# Allegro board pc065a_toplevel_05_remove_notch.brd
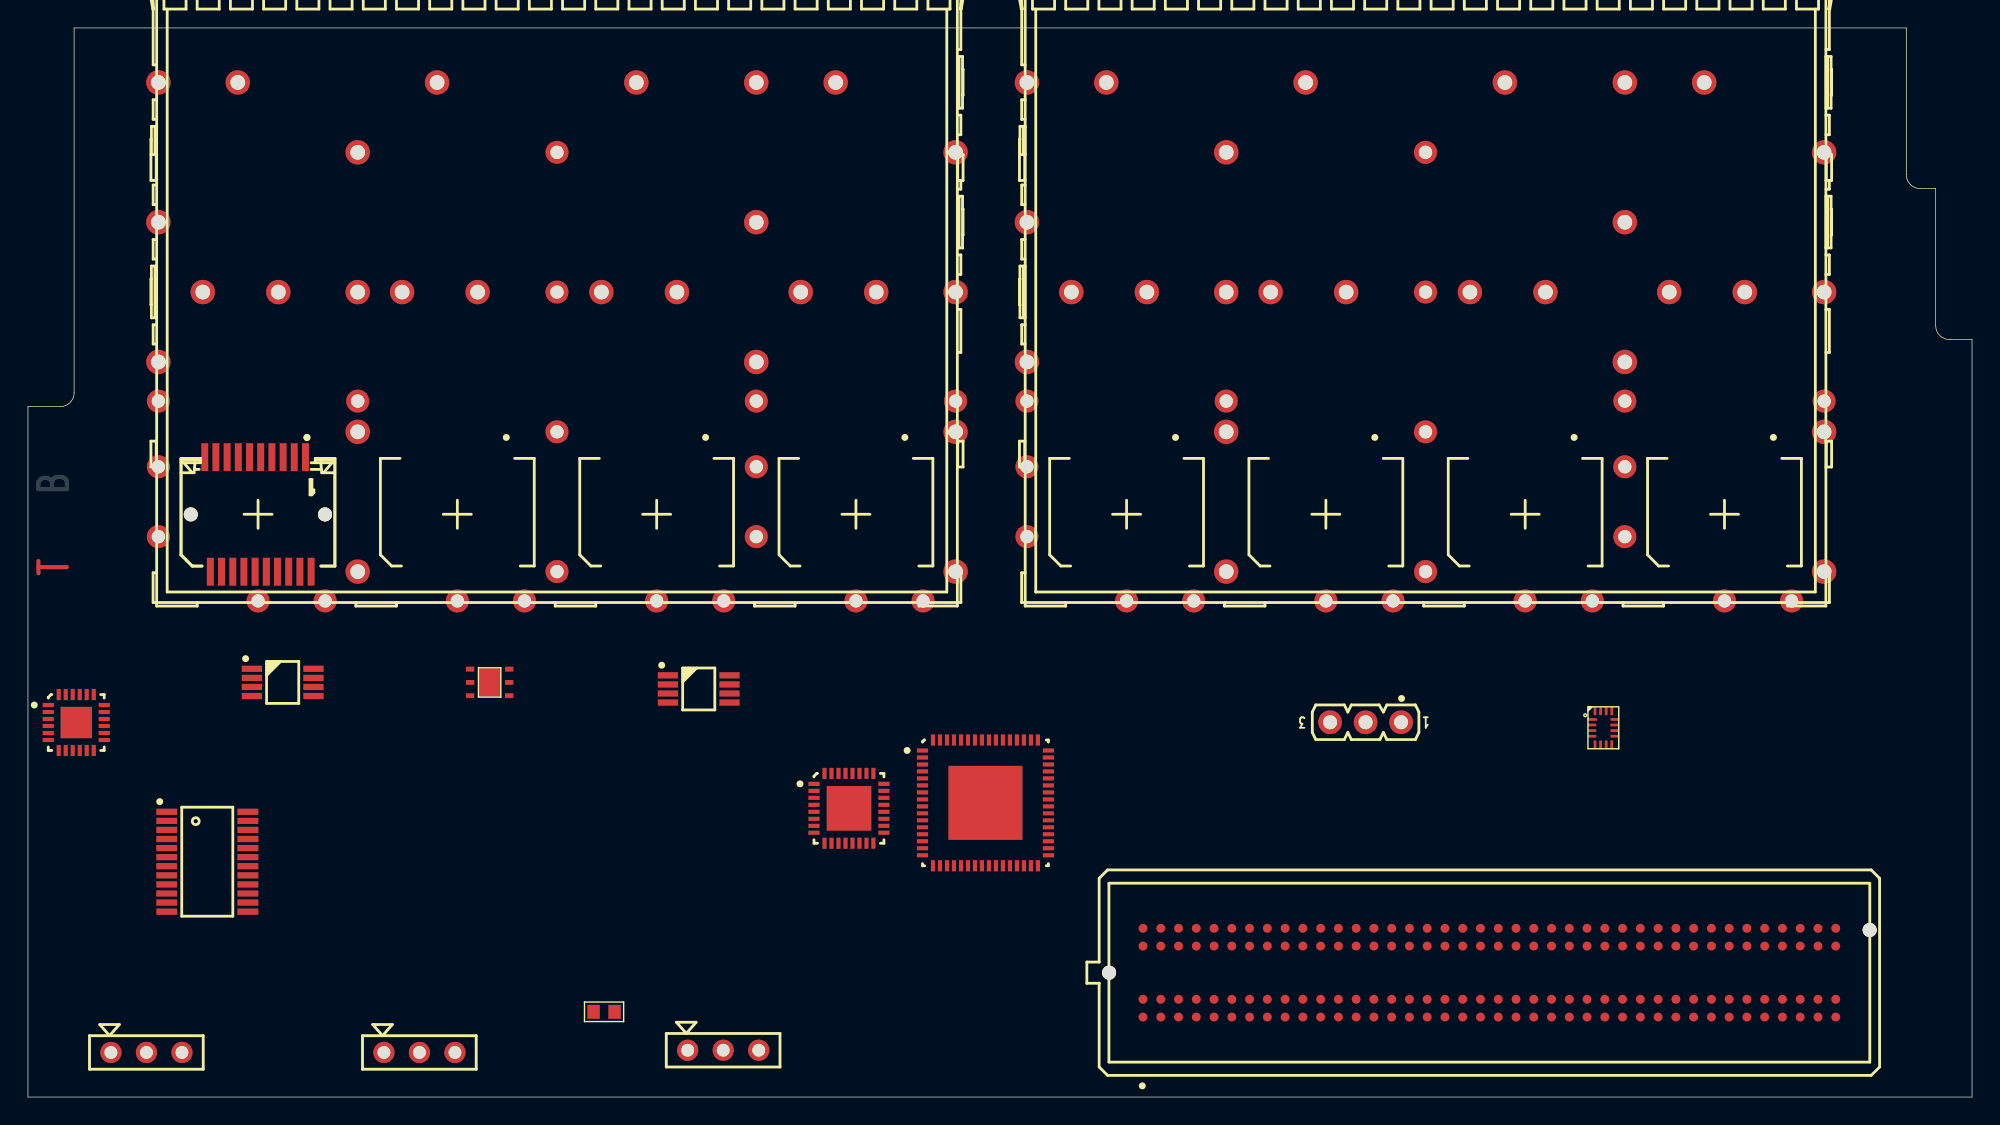
[diagram p0: board, top side]
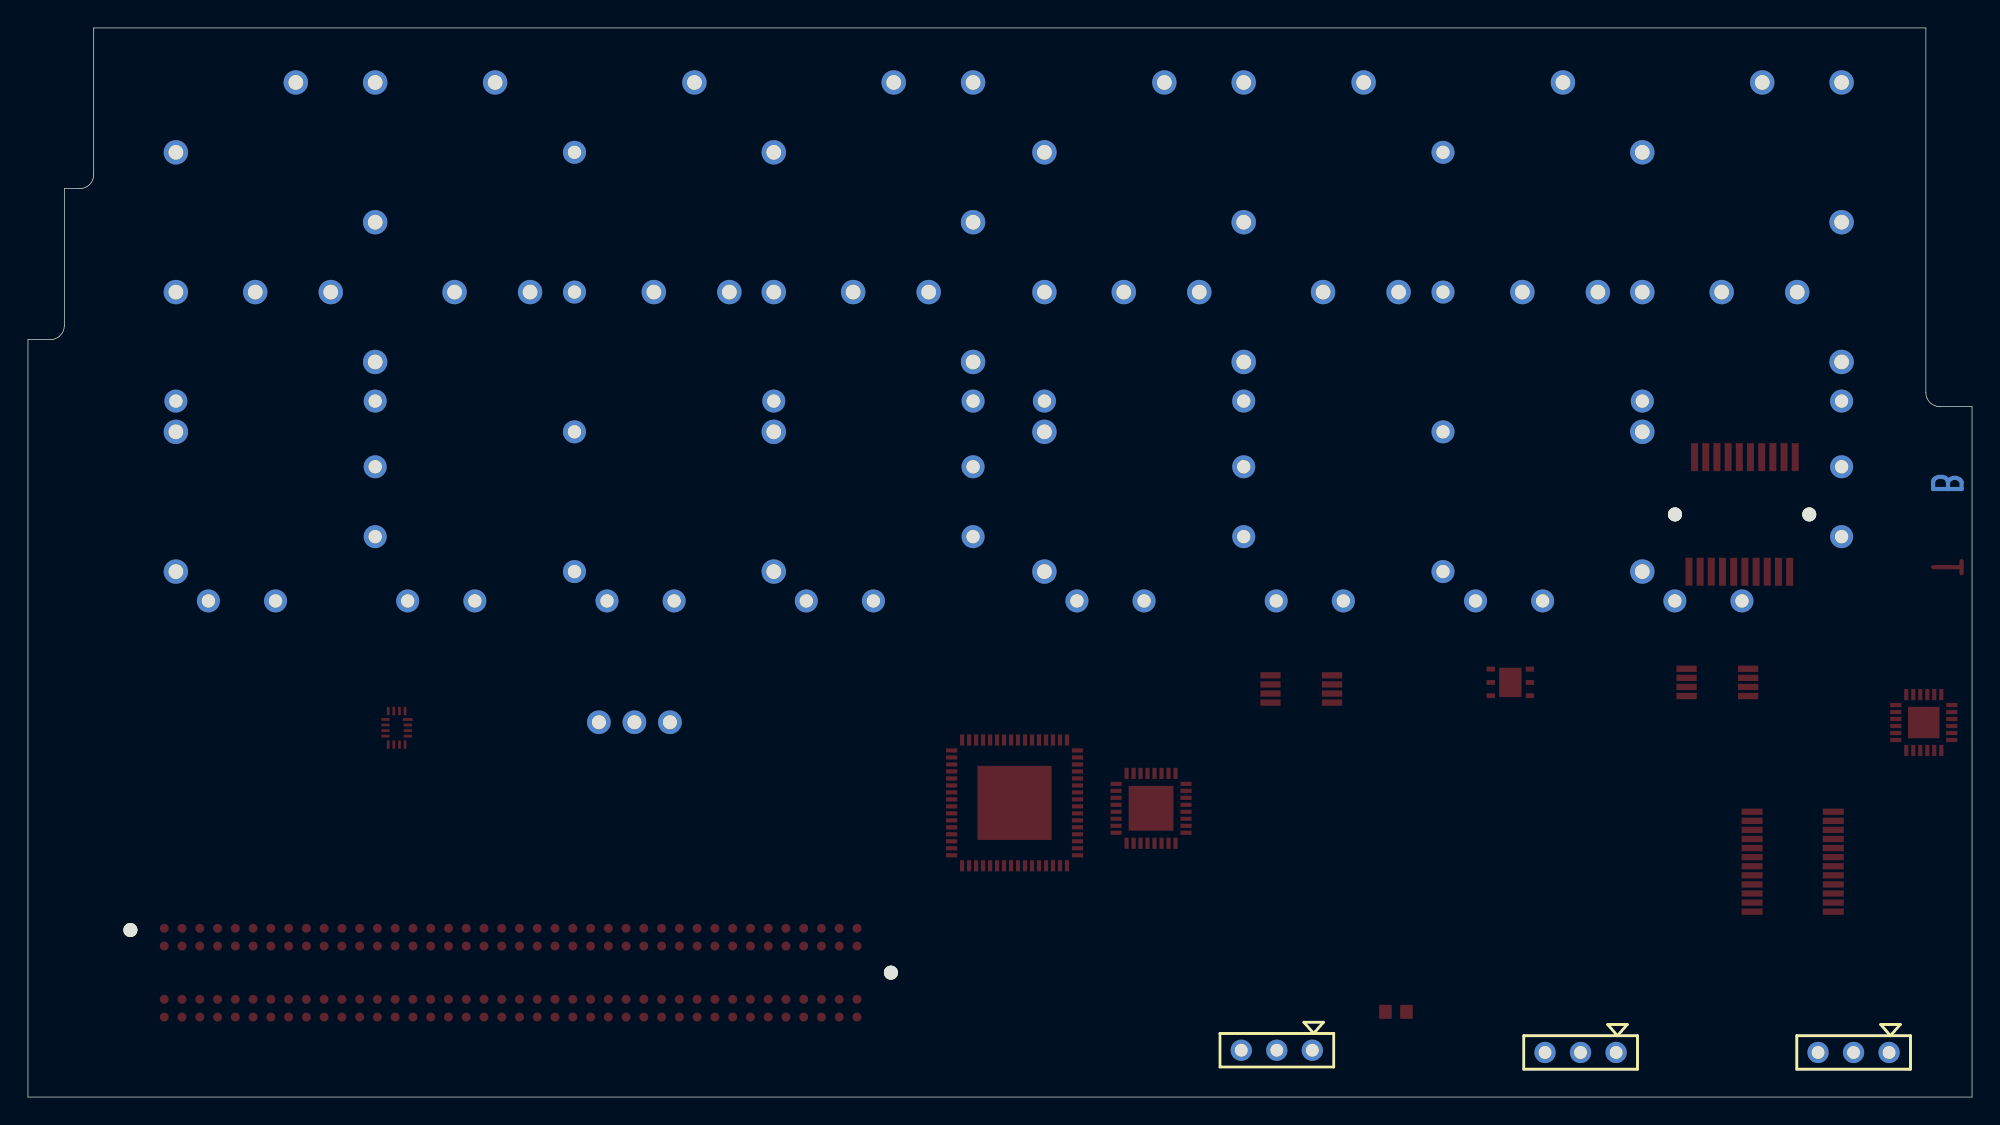
[diagram p1: board, bottom side, seen from below]

Outline 139 x 76.5 mm; copper layers: TOP, L2, L3, L4, L5, BOTTOM. Coordinates in mm from the lower left corner of the outline.
Outline path: 0,49.4 0,0 139,0 139,54.2 137.4,54.2 arc(136.69,54.49) 136.4,55.2 136.4,65 135.3,65 arc(134.59,65.29) 134.3,66 134.3,76.5 3.3,76.5 3.3,50.4 arc(3.01,49.69) 2.3,49.4 0,49.4

## Design rules (mm)
constraint set DEFAULT: min track width 0.17, pair gap 0.3
net group CLK_IN_N: nets CLK_IN_N<0> CLK_IN_N<1> CLK_IN_N<2> CLK_IN_N<3>
net group CLK_IN_P: nets CLK_IN_P<0> CLK_IN_P<1> CLK_IN_P<2> CLK_IN_P<3>
net group CLK_MAIN_N: nets CLK_MAIN_N<0> CLK_MAIN_N<1> CLK_MAIN_N<2> CLK_MAIN_N<3> CLK_MAIN_N<4> CLK_MAIN_N<5> CLK_MAIN_N<6> CLK_MAIN_N<7> CLK_MAIN_N<8>
net group CLK_MAIN_P: nets CLK_MAIN_P<0> CLK_MAIN_P<1> CLK_MAIN_P<2> CLK_MAIN_P<3> CLK_MAIN_P<4> CLK_MAIN_P<5> CLK_MAIN_P<6> CLK_MAIN_P<7> CLK_MAIN_P<8>
net group CLK_SI_N: nets CLK_SI_N<0> CLK_SI_N<1> CLK_SI_N<2> CLK_SI_N<3>
net group CLK_SI_P: nets CLK_SI_P<0> CLK_SI_P<1> CLK_SI_P<2> CLK_SI_P<3>
net group FMC_LA_N: nets FMC_LA_N<3> FMC_LA_N<8> FMC_LA_N<12> FMC_LA_N<16> FMC_LA_N<17> FMC_LA_N<20> FMC_LA_N<22> FMC_LA_N<23> FMC_LA_N<25> FMC_LA_N<27> FMC_LA_N<28> FMC_LA_N<29> FMC_LA_N<30> FMC_LA_N<31> FMC_LA_N<32> FMC_LA_N<33> RST_I2C_B_CVCC
net group FMC_LA_P: nets FMC_LA_P<3> FMC_LA_P<8> FMC_LA_P<12> FMC_LA_P<16> FMC_LA_P<17> FMC_LA_P<20> FMC_LA_P<22> FMC_LA_P<23> FMC_LA_P<25> FMC_LA_P<26> FMC_LA_P<27> FMC_LA_P<28> FMC_LA_P<29> FMC_LA_P<30> FMC_LA_P<31> FMC_LA_P<32> FMC_LA_P<33>
net group MUX_SEL: nets MUX_SEL<0> MUX_SEL<1> MUX_SEL<2>
net group RD_BUF_N: nets RD_BUF_N<0> RD_BUF_N<1> RD_BUF_N<2> RD_BUF_N<3>
net group RD_BUF_P: nets RD_BUF_P<0> RD_BUF_P<1> RD_BUF_P<2> RD_BUF_P<3>
net group RD_MUX_N: nets RD_MUX_N<0> RD_MUX_N<1> RD_MUX_N<2> RD_MUX_N<3> RD_MUX_N<4> RD_MUX_N<5> RD_MUX_N<6> RD_MUX_N<7>
net group RD_MUX_P: nets RD_MUX_P<0> RD_MUX_P<1> RD_MUX_P<2> RD_MUX_P<3> RD_MUX_P<4> RD_MUX_P<5> RD_MUX_P<6> RD_MUX_P<7>
net group SFP_FAULT: nets SFP_FAULT<0> SFP_FAULT<1> SFP_FAULT<2> SFP_FAULT<3>
net group SFP_I2C_SCL: nets SFP_I2C_SCL<0> SFP_I2C_SCL<1> SFP_I2C_SCL<2> SFP_I2C_SCL<3> SFP_I2C_SCL<4> SFP_I2C_SCL<5> SFP_I2C_SCL<6> SFP_I2C_SCL<7>
net group SFP_I2C_SCL_CVCC: nets FMC_LA_N<1> FMC_LA_N<5> FMC_LA_N<6> FMC_LA_N<9> FMC_LA_N<10> FMC_LA_N<13> FMC_LA_N<14> FMC_LA_N<18>
net group SFP_I2C_SDA: nets SFP_I2C_SDA<0> SFP_I2C_SDA<1> SFP_I2C_SDA<2> SFP_I2C_SDA<3> SFP_I2C_SDA<4> SFP_I2C_SDA<5> SFP_I2C_SDA<6> SFP_I2C_SDA<7>
net group SFP_I2C_SDA_CVCC: nets FMC_LA_P<1> FMC_LA_P<5> FMC_LA_P<6> FMC_LA_P<9> FMC_LA_P<10> FMC_LA_P<13> FMC_LA_P<14> FMC_LA_P<18>
net group SFP_LOS: nets SFP_LOS<0> SFP_LOS<1> SFP_LOS<2> SFP_LOS<3> SFP_LOS<4> SFP_LOS<5> SFP_LOS<6> SFP_LOS<7>
net group SFP_TX_DISABLE: nets SFP_TX_DISABLE<0> SFP_TX_DISABLE<1> SFP_TX_DISABLE<2> SFP_TX_DISABLE<3> SFP_TX_DISABLE<4> SFP_TX_DISABLE<5> SFP_TX_DISABLE<6> SFP_TX_DISABLE<7>
net group SFP_TX_FAULT: nets SFP_TX_FAULT<4> SFP_TX_FAULT<5> SFP_TX_FAULT<6> SFP_TX_FAULT<7>
net group TD_FFD_N: nets FMC_LA_N<2> FMC_LA_N<4> FMC_LA_N<7> FMC_LA_N<11> FMC_LA_N<15> FMC_LA_N<19> FMC_LA_N<21> FMC_LA_N<24>
net group TD_FFD_P: nets FMC_LA_P<2> FMC_LA_P<4> FMC_LA_P<7> FMC_LA_P<11> FMC_LA_P<15> FMC_LA_P<19> FMC_LA_P<21> FMC_LA_P<24>

## Placement (name value [footprint] x y rotation side)
IC1  -  [SOP65P640X120-24N]  12.82 16.84 0 top
IC2  -  [QFN50P500X500X90-33N-S320]  58.7 20.66 0 top
IC3  -  [QFN50P900X900X90-65N-S530]  68.46 21.05 0 top
IC10  -  [QFN50P400X400X80-25N-S225]  3.45 26.8 0 top
IC21  -  [UQFN_16PIN]  112.64 26.42 0 top
J1  -  [SAMTEC_MTLW-103-07-L-S-250]  95.64 26.82 180 top
J2  -  [CONHE13D3X1M]  5.93 3.19 0 top
J3  -  [CONHE13D3X1M]  25.45 3.19 0 top
J4  -  [CONHE13D3X1M]  47.17 3.35 0 top
J7  -  [TYCO_1888247-1]  16.44 41.69 270 top
J10  -  [SAMTEC_ASP-134606-01]  104.49 8.9 180 top
R1  00  [C0603]  41.19 6.1 0 top
SFP1  -  [TYCO_2007132]  59.2 41.7 270 top
SFP2  -  [TYCO_2007132]  121.3 41.7 270 top
U1  -  [SOP65P490X110-8N]  18.21 29.67 0 top
U2  -  [WSON6]  33.01 29.67 0 top
U3  -  [SOP65P490X110-8N]  47.96 29.2 0 top

## Library data of the parts
IC1 = 854S058I: part number: 854S058AGILF
IC2 = SY89838U: part number: SY89838UMG
IC3 = SI5395: part number: SI5395A-A-GM; room: CLOCK_MODULE
IC10 = TCA9539: part number: TCA9539AHF
IC21 = 74AVC4T245_BRIS: part number: SN74AVC4T245RSVR_BRIS
J1 = CON3P: part number: CON3P-MTLW-103-07-L-S-250
J2-J4 = CON3P: part number: CON3P-SIL254D
J7 = CON20P_SFP: part number: CON20P_SFP-1888247-1; room: SFP_0
J10 = CON160P_40CDGH: part number: ASP-134606-01
R1 = RSMD0603: part number: RSMD0603_-00,
SFP1 SFP2 = SFP_CAGE_X4: part number: TYCO_2007132
U1 = MAX9381_UMAX
U2 = LP38692SD: part number: LP38692SD_WSON-1.8V,TEXAS INSTRUMENTS; room: CLOCK_MODULE
U3 = MAX9381_UMAX: room: SFP_0

## Footprints (pads in the part's own frame, mm; a bottom-side part is the same pattern mirrored in y, then rotated)
C0603
  rect 0.9x1 smd: 1(-0.75,0) 2(0.75,0)
CONHE13D3X1M
  round 1.524 hole 0.914: 1(0,0) 2(2.54,0) 3(5.08,0)
QFN50P400X400X80-25N-S225
  rect 0.8x0.3 smd: 1(-2,1.25) 2(-2,0.75) 3(-2,0.25) 4(-2,-0.25) 5(-2,-0.75) 6(-2,-1.25) 13(2,-1.25) 14(2,-0.75) 15(2,-0.25) 16(2,0.25) 17(2,0.75) 18(2,1.25)
  rect 0.3x0.8 smd: 7(-1.25,-2) 8(-0.75,-2) 9(-0.25,-2) 10(0.25,-2) 11(0.75,-2) 12(1.25,-2) 19(1.25,2) 20(0.75,2) 21(0.25,2) 22(-0.25,2) 23(-0.75,2) 24(-1.25,2)
  rect 2.25x2.25 smd: 25(0,0)
QFN50P500X500X90-33N-S320
  rect 0.8x0.3 smd: 1(-2.5,1.75) 2(-2.5,1.25) 3(-2.5,0.75) 4(-2.5,0.25) 5(-2.5,-0.25) 6(-2.5,-0.75) 7(-2.5,-1.25) 8(-2.5,-1.75) 17(2.5,-1.75) 18(2.5,-1.25) 19(2.5,-0.75) 20(2.5,-0.25) 21(2.5,0.25) 22(2.5,0.75) 23(2.5,1.25) 24(2.5,1.75)
  rect 0.3x0.8 smd: 9(-1.75,-2.5) 10(-1.25,-2.5) 11(-0.75,-2.5) 12(-0.25,-2.5) 13(0.25,-2.5) 14(0.75,-2.5) 15(1.25,-2.5) 16(1.75,-2.5) 25(1.75,2.5) 26(1.25,2.5) 27(0.75,2.5) 28(0.25,2.5) 29(-0.25,2.5) 30(-0.75,2.5) 31(-1.25,2.5) 32(-1.75,2.5)
  rect 3.2x3.2 smd: 33(0,0)
QFN50P900X900X90-65N-S530
  rect 0.8x0.3 smd: 1(-4.5,3.75) 2(-4.5,3.25) 3(-4.5,2.75) 4(-4.5,2.25) 5(-4.5,1.75) 6(-4.5,1.25) 7(-4.5,0.75) 8(-4.5,0.25) 9(-4.5,-0.25) 10(-4.5,-0.75) 11(-4.5,-1.25) 12(-4.5,-1.75) 13(-4.5,-2.25) 14(-4.5,-2.75) 15(-4.5,-3.25) 16(-4.5,-3.75) 33(4.5,-3.75) 34(4.5,-3.25) 35(4.5,-2.75) 36(4.5,-2.25) 37(4.5,-1.75) 38(4.5,-1.25) 39(4.5,-0.75) 40(4.5,-0.25) 41(4.5,0.25) 42(4.5,0.75) 43(4.5,1.25) 44(4.5,1.75) 45(4.5,2.25) 46(4.5,2.75) 47(4.5,3.25) 48(4.5,3.75)
  rect 0.3x0.8 smd: 17(-3.75,-4.5) 18(-3.25,-4.5) 19(-2.75,-4.5) 20(-2.25,-4.5) 21(-1.75,-4.5) 22(-1.25,-4.5) 23(-0.75,-4.5) 24(-0.25,-4.5) 25(0.25,-4.5) 26(0.75,-4.5) 27(1.25,-4.5) 28(1.75,-4.5) 29(2.25,-4.5) 30(2.75,-4.5) 31(3.25,-4.5) 32(3.75,-4.5) 49(3.75,4.5) 50(3.25,4.5) 51(2.75,4.5) 52(2.25,4.5) 53(1.75,4.5) 54(1.25,4.5) 55(0.75,4.5) 56(0.25,4.5) 57(-0.25,4.5) 58(-0.75,4.5) 59(-1.25,4.5) 60(-1.75,4.5) 61(-2.25,4.5) 62(-2.75,4.5) 63(-3.25,4.5) 64(-3.75,4.5)
  rect 5.3x5.3 smd: 65(0,0)
SAMTEC_ASP-134606-01
  round 1.001 hole 1.3 unplated: (-27.19,-3.05) (27.19,0)
  round 0.64 smd: C1(24.765,3.175) C2(23.495,3.175) C3(22.225,3.175) C4(20.955,3.175) C5(19.685,3.175) C6(18.415,3.175) C7(17.145,3.175) C8(15.875,3.175) C9(14.605,3.175) C10(13.335,3.175) C11(12.065,3.175) C12(10.795,3.175) C13(9.525,3.175) C14(8.255,3.175) C15(6.985,3.175) C16(5.715,3.175) C17(4.445,3.175) C18(3.175,3.175) C19(1.905,3.175) C20(0.635,3.175) C21(-0.635,3.175) C22(-1.905,3.175) C23(-3.175,3.175) C24(-4.445,3.175) C25(-5.715,3.175) C26(-6.985,3.175) C27(-8.255,3.175) C28(-9.525,3.175) C29(-10.795,3.175) C30(-12.065,3.175) C31(-13.335,3.175) C32(-14.605,3.175) C33(-15.875,3.175) C34(-17.145,3.175) C35(-18.415,3.175) C36(-19.685,3.175) C37(-20.955,3.175) C38(-22.225,3.175) C39(-23.495,3.175) C40(-24.765,3.175) D1(24.765,1.905) D2(23.495,1.905) D3(22.225,1.905) D4(20.955,1.905) D5(19.685,1.905) D6(18.415,1.905) D7(17.145,1.905) D8(15.875,1.905) D9(14.605,1.905) D10(13.335,1.905) D11(12.065,1.905) D12(10.795,1.905) D13(9.525,1.905) D14(8.255,1.905) D15(6.985,1.905) D16(5.715,1.905) D17(4.445,1.905) D18(3.175,1.905) D19(1.905,1.905) D20(0.635,1.905) D21(-0.635,1.905) D22(-1.905,1.905) D23(-3.175,1.905) D24(-4.445,1.905) D25(-5.715,1.905) D26(-6.985,1.905) D27(-8.255,1.905) D28(-9.525,1.905) D29(-10.795,1.905) D30(-12.065,1.905) D31(-13.335,1.905) D32(-14.605,1.905) D33(-15.875,1.905) D34(-17.145,1.905) D35(-18.415,1.905) D36(-19.685,1.905) D37(-20.955,1.905) D38(-22.225,1.905) D39(-23.495,1.905) D40(-24.765,1.905) G1(24.765,-1.905) G2(23.495,-1.905) G3(22.225,-1.905) G4(20.955,-1.905) G5(19.685,-1.905) G6(18.415,-1.905) G7(17.145,-1.905) G8(15.875,-1.905) G9(14.605,-1.905) G10(13.335,-1.905) G11(12.065,-1.905) G12(10.795,-1.905) G13(9.525,-1.905) G14(8.255,-1.905) G15(6.985,-1.905) G16(5.715,-1.905) G17(4.445,-1.905) G18(3.175,-1.905) G19(1.905,-1.905) G20(0.635,-1.905) G21(-0.635,-1.905) G22(-1.905,-1.905) G23(-3.175,-1.905) G24(-4.445,-1.905) G25(-5.715,-1.905) G26(-6.985,-1.905) G27(-8.255,-1.905) G28(-9.525,-1.905) G29(-10.795,-1.905) G30(-12.065,-1.905) G31(-13.335,-1.905) G32(-14.605,-1.905) G33(-15.875,-1.905) G34(-17.145,-1.905) G35(-18.415,-1.905) G36(-19.685,-1.905) G37(-20.955,-1.905) G38(-22.225,-1.905) G39(-23.495,-1.905) G40(-24.765,-1.905) H1(24.765,-3.175) H2(23.495,-3.175) H3(22.225,-3.175) H4(20.955,-3.175) H5(19.685,-3.175) H6(18.415,-3.175) H7(17.145,-3.175) H8(15.875,-3.175) H9(14.605,-3.175) H10(13.335,-3.175) H11(12.065,-3.175) H12(10.795,-3.175) H13(9.525,-3.175) H14(8.255,-3.175) H15(6.985,-3.175) H16(5.715,-3.175) H17(4.445,-3.175) H18(3.175,-3.175) H19(1.905,-3.175) H20(0.635,-3.175) H21(-0.635,-3.175) H22(-1.905,-3.175) H23(-3.175,-3.175) H24(-4.445,-3.175) H25(-5.715,-3.175) H26(-6.985,-3.175) H27(-8.255,-3.175) H28(-9.525,-3.175) H29(-10.795,-3.175) H30(-12.065,-3.175) H31(-13.335,-3.175) H32(-14.605,-3.175) H33(-15.875,-3.175) H34(-17.145,-3.175) H35(-18.415,-3.175) H36(-19.685,-3.175) H37(-20.955,-3.175) H38(-22.225,-3.175) H39(-23.495,-3.175) H40(-24.765,-3.175)
SAMTEC_MTLW-103-07-L-S-250
  round 1.7 hole 1: 1(-2.54,0) 2(0,0) 3(2.54,0)
SOP65P490X110-8N
  rect 1.45x0.45 smd: 1(-2.2,0.975) 2(-2.2,0.325) 3(-2.2,-0.325) 4(-2.2,-0.975) 5(2.2,-0.975) 6(2.2,-0.325) 7(2.2,0.325) 8(2.2,0.975)
SOP65P640X120-24N
  rect 1.5x0.45 smd: 1(-2.9,3.575) 2(-2.9,2.925) 3(-2.9,2.275) 4(-2.9,1.625) 5(-2.9,0.975) 6(-2.9,0.325) 7(-2.9,-0.325) 8(-2.9,-0.975) 9(-2.9,-1.625) 10(-2.9,-2.275) 11(-2.9,-2.925) 12(-2.9,-3.575) 13(2.9,-3.575) 14(2.9,-2.925) 15(2.9,-2.275) 16(2.9,-1.625) 17(2.9,-0.975) 18(2.9,-0.325) 19(2.9,0.325) 20(2.9,0.975) 21(2.9,1.625) 22(2.9,2.275) 23(2.9,2.925) 24(2.9,3.575)
TYCO_1888247-1
  round 1 hole 1.55 unplated: (0,4.8) (0,-4.8)
  rect 2x0.5 smd: 1(-4.1,3.4) 2(-4.1,2.6) 3(-4.1,1.8) 4(-4.1,1) 5(-4.1,0.2) 6(-4.1,-0.6) 7(-4.1,-1.4) 8(-4.1,-2.2) 9(-4.1,-3) 10(-4.1,-3.8) 11(4.1,-3.4) 12(4.1,-2.6) 13(4.1,-1.8) 14(4.1,-1) 15(4.1,-0.2) 16(4.1,0.6) 17(4.1,1.4) 18(4.1,2.2) 19(4.1,3) 20(4.1,3.8)
TYCO_2007132
  round 1.75 hole 1.05: 1(-30.9,-49.875) 2(-30.9,-44.2) 3(-30.9,-29.95) 4(-30.9,-15.7) 5(-30.9,-7.125) 6(-30.9,-1.45) 7(-25.9,-35.625) 9(-25.9,7.125) 10(-20.9,-49.875) 11(-20.9,-7.125) 12(-15.9,-46.7) 13(-15.9,-41.3) 14(-15.9,-35.625) 15(-15.9,-32.45) 16(-15.9,-27.05) 18(-15.9,-18.2) 19(-15.9,-12.8) 20(-15.9,-3.95) 21(-15.9,1.45) 22(-15.9,7.125) 24(-10.9,-49.875) 27(-10.9,-7.125) 30(-5.9,-35.625) 33(-5.9,7.125) 38(4.1,-35.625) 46(4.1,7.125)
  round 1.65 hole 0.95: 8(-25.9,-21.375) 17(-15.9,-21.375) 23(-8.1,-49.875) 25(-8.1,-35.625) 26(-8.1,-7.125) 28(-8.1,7.125) 29(-3.4,-49.875) 31(-5.9,-21.375) 32(-3.4,-7.125) 34(1.6,-49.875) 35(1.6,-7.125) 36(6.2,-42.75) 37(6.2,-37.95) 39(6.2,-28.5) 40(4.1,-21.375) 41(6.2,-23.7) 42(6.2,-14.25) 43(6.2,-9.45) 44(6.2,0) 45(6.2,4.8)
  round 0 smd: NC(-17.517,-21.25)
UQFN_16PIN
  rrect 0.7x0.2 smd: 1(-0.8,0.6)
  rrect 0.6x0.2 smd: 2(-0.8,0.2) 3(-0.8,-0.2) 4(-0.8,-0.6) 9(0.8,-0.6) 10(0.8,-0.2) 11(0.8,0.2) 12(0.8,0.6)
  rrect 0.2x0.6 smd: 5(-0.6,-1.2) 6(-0.2,-1.2) 7(0.2,-1.2) 8(0.6,-1.2) 13(0.6,1.2) 14(0.2,1.2) 15(-0.2,1.2) 16(-0.6,1.2)
WSON6
  rect 0.6x0.35 smd: 1(-1.4,0.95) 2(-1.4,0) 3(-1.4,-0.95) 4(1.4,-0.95) 5(1.4,0) 6(1.4,0.95)
  rect 1.6x2.1 smd: 7(0,0)

## Nets
GND: IC1.17 IC2.20 IC2.21 IC2.33 IC3.65 IC10.9 IC10.25 IC21.10 IC21.11 J1.1 J7.1 J7.9 J7.10 J7.11 J7.14 J7.17 J7.20(VEET3) J10.C1 J10.C4 J10.C5 J10.C8 J10.C9 J10.C12 J10.C13 J10.C16 J10.C17 J10.C20 J10.C21 J10.C24 J10.C25 J10.C28 J10.C29 J10.C32 J10.C33 J10.C36 J10.C38 J10.C40 J10.D2 J10.D3 J10.D6 J10.D7 J10.D10 J10.D13 J10.D16 J10.D19 J10.D22 J10.D25 J10.D28 J10.D37 J10.D39 J10.G1 J10.G4 J10.G5 J10.G8 J10.G11 J10.G14 J10.G17 J10.G20 J10.G23 J10.G26 J10.G29 J10.G32 J10.G35 J10.G38 J10.G40 J10.H3 J10.H6 J10.H9(H<9>) J10.H12 J10.H15 J10.H18 J10.H21 J10.H24 J10.H27 J10.H30 J10.H33 J10.H36 J10.H39 SFP1.1 SFP1.2 SFP1.3 SFP1.4 SFP1.5 SFP1.6 SFP1.7 SFP1.8 SFP1.9 SFP1.10 SFP1.11 SFP1.12 SFP1.13 SFP1.14 SFP1.15 SFP1.16 SFP1.17 SFP1.18 SFP1.19 SFP1.20 SFP1.21 SFP1.22 SFP1.23 SFP1.24 SFP1.25 SFP1.26 SFP1.27 SFP1.28 SFP1.29 SFP1.30 SFP1.31 SFP1.32 SFP1.33 SFP1.34 SFP1.35 SFP1.36 SFP1.37 SFP1.38 SFP1.39 SFP1.40 SFP1.41 SFP1.42 SFP1.43 SFP1.44 SFP1.45 SFP1.46 SFP2.1 SFP2.2 SFP2.3 SFP2.4 SFP2.5 SFP2.6 SFP2.7 SFP2.8 SFP2.9 SFP2.10 SFP2.11 SFP2.12 SFP2.13 SFP2.14 SFP2.15 SFP2.16 SFP2.17 SFP2.18 SFP2.19 SFP2.20 SFP2.21 SFP2.22 SFP2.23 SFP2.24 SFP2.25 SFP2.26 SFP2.27 SFP2.28 SFP2.29 SFP2.30 SFP2.31 SFP2.32 SFP2.33 SFP2.34 SFP2.35 SFP2.36 SFP2.37 SFP2.38 SFP2.39 SFP2.40 SFP2.41 SFP2.42 SFP2.43 SFP2.44 SFP2.45 SFP2.46 U2.2 U2.7 U3.5
P1V8A: IC3.13 U2.4 U2.5(SNS)
P2V5: IC21.3
P3V3: IC10.21 IC21.2 J10.C39 J10.D36 J10.D38 J10.D40 U3.8
P3V3A: IC3.32 IC3.46 IC3.60 U2.1 U2.6
P3V3B: IC3.22 IC3.26 IC3.29 IC3.33 IC3.36 IC3.40 IC3.43 IC3.49 IC3.52 IC3.57
P12V: J10.C35 J10.C37
VCC: IC2.9 IC2.19 IC2.22 IC2.32 U1.8
VDD: IC1.5 IC1.20
VEE: U1.5
3P3VAUX: J10.D32
CDR_D_N: J10.C7
CDR_D_P: J10.C6
CLK_IN_N<1>: J10.G7
CLK_IN_N<3>: IC3.58
CLK_IN_P<1>: J10.G6
CLK_IN_P<3>: IC3.59
CLK_INTR_B: IC3.12
CLK_LOL_B: IC3.47
CLK_MAIN_N<0>: IC3.23 U3.4
CLK_MAIN_N<1>: IC3.27
CLK_MAIN_N<2>: IC3.30
CLK_MAIN_N<3>: IC3.34
CLK_MAIN_N<4>: IC3.37
CLK_MAIN_N<5>: IC3.41
CLK_MAIN_N<6>: IC3.44
CLK_MAIN_N<7>: IC3.50
CLK_MAIN_N<8>: IC3.53 J10.G3
CLK_MAIN_P<0>: IC3.24 U3.3
CLK_MAIN_P<1>: IC3.28
CLK_MAIN_P<2>: IC3.31
CLK_MAIN_P<3>: IC3.35
CLK_MAIN_P<4>: IC3.38
CLK_MAIN_P<5>: IC3.42
CLK_MAIN_P<6>: IC3.45
CLK_MAIN_P<7>: IC3.51
CLK_MAIN_P<8>: IC3.54 J10.G2
CLK_RST_B: IC3.6
CLK_SI_N<0>: IC3.64
CLK_SI_N<1>: IC3.2
CLK_SI_N<2>: IC3.15
CLK_SI_N<3>: IC3.62
CLK_SI_P<0>: IC3.63
CLK_SI_P<1>: IC3.1
CLK_SI_P<2>: IC3.14
CLK_SI_P<3>: IC3.61
DP0_C2M_N: J10.C3
DP0_C2M_P: J10.C2
FMC_LA_N<1>: J10.D9
FMC_LA_N<2>: J10.H8 U3.2
FMC_LA_N<3>: J10.G10
FMC_LA_N<4>: J10.H11
FMC_LA_N<5>: J10.D12
FMC_LA_N<6>: J10.C11
FMC_LA_N<7>: J10.H14
FMC_LA_N<8>: J10.G13
FMC_LA_N<9>: J10.D15
FMC_LA_N<10>: J10.C15
FMC_LA_N<11>: J10.H17
FMC_LA_N<12>: J10.G16
FMC_LA_N<13>: J10.D18
FMC_LA_N<14>: J10.C19
FMC_LA_N<15>: J10.H20
FMC_LA_N<16>: J10.G19
FMC_LA_N<17>: J10.D21
FMC_LA_N<18>: J10.C23
FMC_LA_N<19>: J10.H23
FMC_LA_N<20>: J10.G22
FMC_LA_N<21>: J10.H26
FMC_LA_N<22>: J10.G25
FMC_LA_N<23>: J10.D24
FMC_LA_N<24>: J10.H29
FMC_LA_N<25>: J10.G28
FMC_LA_N<27>: IC21.8 J10.C27
FMC_LA_N<28>: J10.H32
FMC_LA_N<29>: J10.G31
FMC_LA_N<30>: J10.H35
FMC_LA_N<31>: J10.G34
FMC_LA_N<32>: J10.H38
FMC_LA_N<33>: J10.G37
FMC_LA_P<1>: J10.D8
FMC_LA_P<2>: J10.H7 U3.1
FMC_LA_P<3>: J10.G9
FMC_LA_P<4>: J10.H10
FMC_LA_P<5>: J10.D11
FMC_LA_P<6>: J10.C10
FMC_LA_P<7>: J10.H13
FMC_LA_P<8>: J10.G12
FMC_LA_P<9>: J10.D14
FMC_LA_P<10>: J10.C14
FMC_LA_P<11>: J10.H16
FMC_LA_P<12>: J10.G15
FMC_LA_P<13>: J10.D17
FMC_LA_P<14>: J10.C18
FMC_LA_P<15>: J10.H19
FMC_LA_P<16>: J10.G18
FMC_LA_P<17>: J10.D20
FMC_LA_P<18>: J10.C22
FMC_LA_P<19>: J10.H22
FMC_LA_P<20>: J10.G21
FMC_LA_P<21>: J10.H25
FMC_LA_P<22>: J10.G24
FMC_LA_P<23>: J10.D23
FMC_LA_P<24>: J10.H28
FMC_LA_P<25>: J10.G27
FMC_LA_P<26>: IC21.7 J10.D26
FMC_LA_P<27>: IC21.6 J10.C26
FMC_LA_P<28>: J10.H31
FMC_LA_P<29>: J10.G30
FMC_LA_P<30>: J10.H34
FMC_LA_P<31>: J10.G33
FMC_LA_P<32>: J10.H37
FMC_LA_P<33>: J10.G36
GBTCLK0_M2C_N: J10.D5
GBTCLK0_M2C_P: J10.D4
I2C_SCL: IC3.16 IC10.19 J1.2
I2C_SCL_CVCC: J10.C30
I2C_SDA: IC3.18 IC10.20(SDA) J1.3(A<2>)
I2C_SDA_CVCC: J10.C31
MOD_ABS: J7.6
MUX_SEL<0>: IC21.15(1B<0>)
MUX_SEL<1>: IC21.14
MUX_SEL<2>: IC21.13
POWER_GOOD: J10.D1
PRSNT_L: J10.H2
RD_BUF_N<0>: J7.12
RD_BUF_P<0>: J7.13
REC_CLK_FPGA_N: J10.H5
REC_CLK_FPGA_P: J10.H4
RST_I2C_B: IC10.24 IC21.12
RST_I2C_B_CVCC: IC21.9 J10.D27
SFP_FAULT<0>: IC10.10 J7.2
SFP_FAULT<1>: IC10.11
SFP_FAULT<2>: IC10.12
SFP_FAULT<3>: IC10.13
SFP_FAULT<4>: IC10.14
SFP_FAULT<5>: IC10.15
SFP_FAULT<6>: IC10.16
SFP_FAULT<7>: IC10.17
SFP_I2C_SCL<0>: J7.5
SFP_I2C_SDA<0>: J7.4
SFP_LOS<0>: J7.8
SFP_TD_N: J7.19 U3.6
SFP_TD_P: J7.18 U3.7(Q_P)
SFP_TX_DISABLE<0>: IC10.1 J7.3
SFP_TX_DISABLE<1>: IC10.2
SFP_TX_DISABLE<2>: IC10.3
SFP_TX_DISABLE<3>: IC10.4
SFP_TX_DISABLE<4>: IC10.5
SFP_TX_DISABLE<5>: IC10.6
SFP_TX_DISABLE<6>: IC10.7
SFP_TX_DISABLE<7>: IC10.8
TCK: J10.D29
TDI: J10.D30
TDO: J10.D31
TMS: J10.D33
TRST_L: J10.D34
UNNAMED_1_CAPCERSMDCL2_I31_B: J7.15
UNNAMED_1_CAPCERSMDCL2_I35_B: J7.16
UNNAMED_1_CON20PSFP_I19_RATESEL: J7.7
UNNAMED_4_FMCLPCGENERIC_I1_GA0: J10.C34
UNNAMED_4_FMCLPCGENERIC_I1_GA1: J10.D35
UNNAMED_8_LP38692SD_I104_EN: U2.3
UNNAMED_8_RSMD0402_I25_B: IC3.3
UNNAMED_8_RSMD0402_I26_B: IC3.4
UNNAMED_8_RSMD0402_I28_B: IC3.48
UNNAMED_8_RSMD0402_I29_B: IC3.25
UNNAMED_8_RSMD0402_I30_B: IC3.39
UNNAMED_8_RSMD0402_I66_B: IC3.11
UNNAMED_8_RSMD0402_I67_B: IC3.17
UNNAMED_8_RSMD0402_I68_B: IC3.19
UNNAMED_13_74AVC4T245BRIS_I75_1: IC21.4
UNNAMED_13_74AVC4T245BRIS_I75_2: IC21.1
UNNAMED_13_74AVC4T245BRIS_I76_1: IC21.16
UNNAMED_13_74AVC4T245BRIS_I76_2: IC21.5
UNNAMED_13_RSMD0402_I6_B: IC10.18
UNNAMED_13_RSMD0402_I8_B: IC10.23
VADJ: J10.G39 J10.H40
VREF_A_M2C: J10.H1
XA: IC3.8
XB: IC3.9(XB)

Pads without a net: IC1 1 2 3 4 6 7 8 9 10 11 12 13 14 15 16 18 19 21 22 23 24; IC2 1 2 3 4 5 6 7 8 10 11 12 13 14 15 16 17 18 23 24 25 26 27 28 29 30 31; IC3 5 7 10 20 21 55 56; IC10 22; J2 1 2 3; J3 1 2 3; J4 1 2 3; R1 1 2; SFP1 NC; SFP2 NC; U1 1 2 3 4 6 7

## Text on the board
BOTTOM: B
User.Comments: PIN A1 REF. | SECOND CONNECTOR | (OPTIONAL) | PRIMARY CONNECTOR
TOP: T
L2: 2
L3: 3
L4: 4
L5: 5
DIMENSION: INPUT 1
